# Altium PCB Yukitora_Mezanine.PcbDoc (part 2 of 2)
Units mm, origin at the board's own origin, x right, y up, seen from the top; angles counter-clockwise.
Board outline 67.05 x 88.93 mm, 2 copper layers (Top Layer, Bottom Layer); 83 components, 77 nets, 528 pads, 27 vias.
Unrouted connection lines stored in the file: 137.
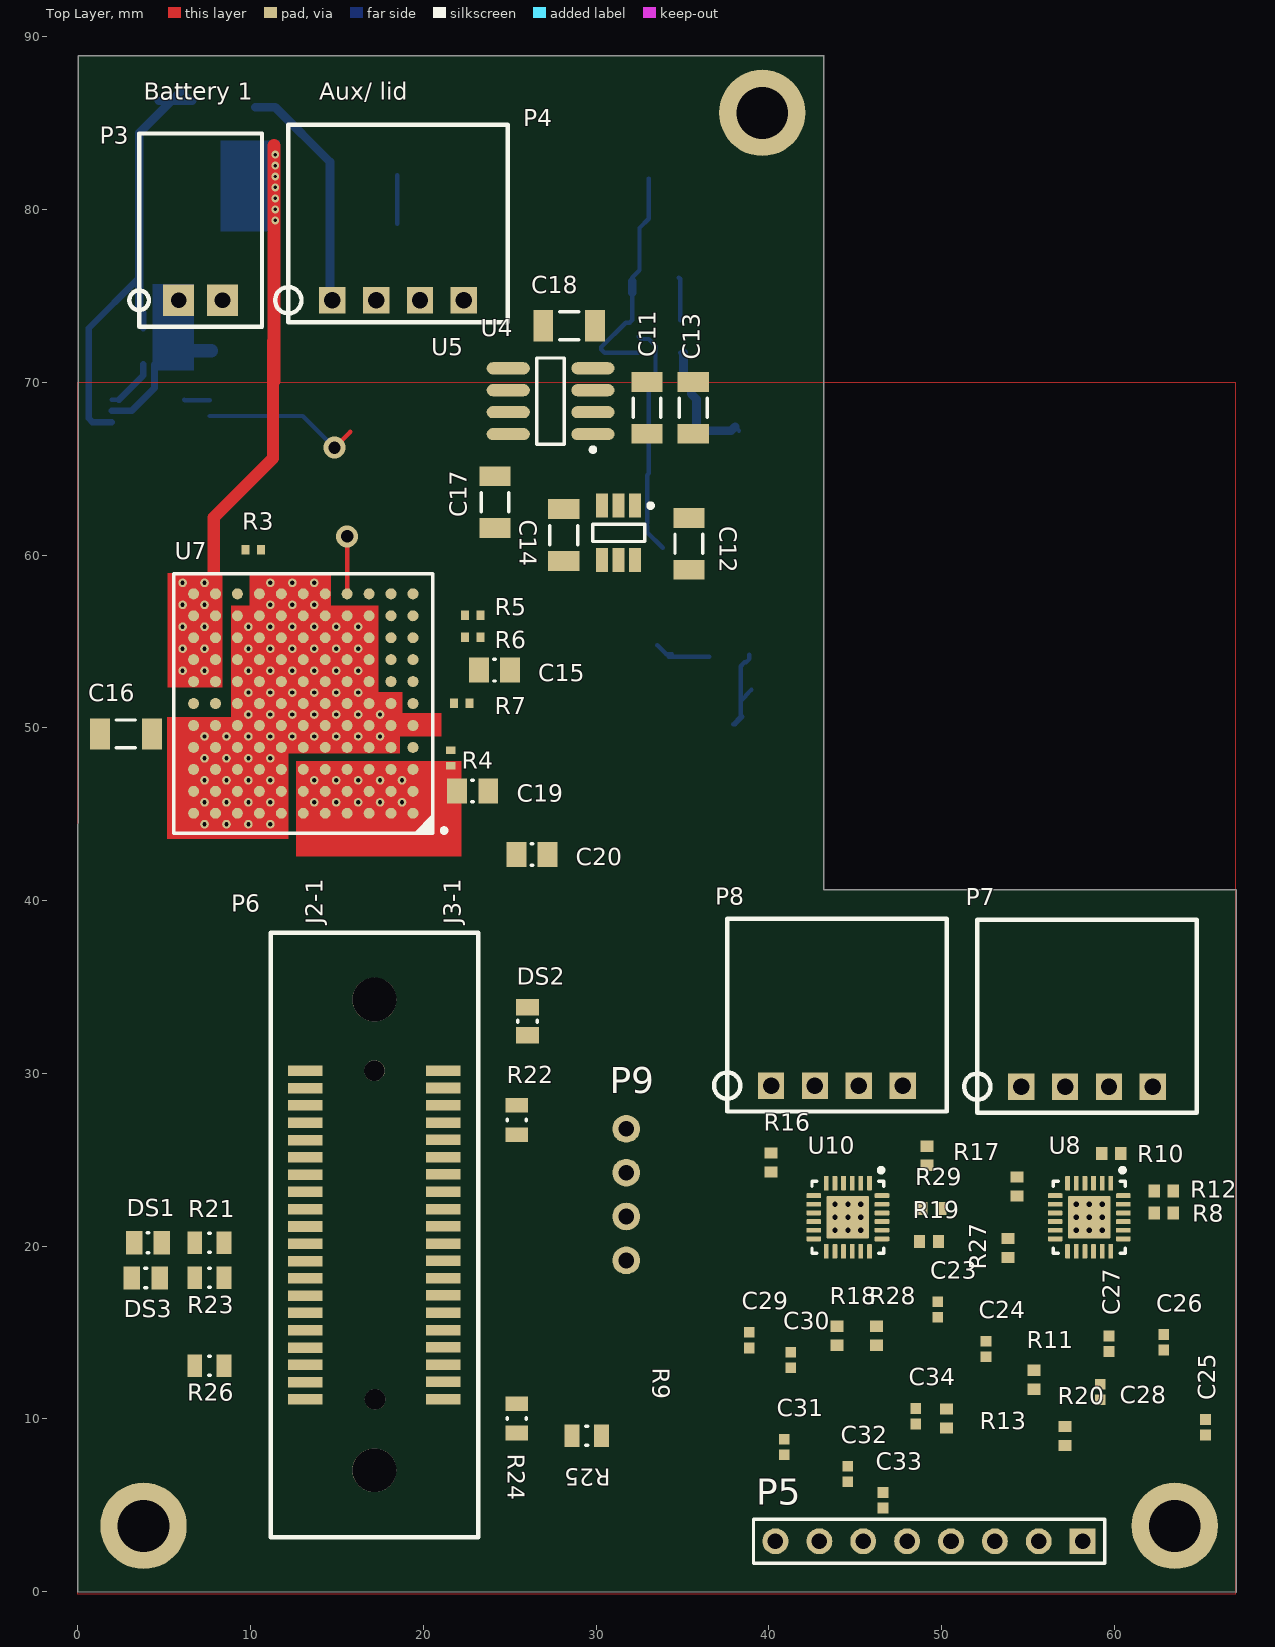
[diagram p0: Top Layer view]

## Part data (continued)
U8 U10: library part CMP-1685-00004-1, "Dual-Bridge Stepper or DC Motor Driver, 2.5 to 10.8 V, -40 to 85 degC, 24-pin QFN (RGE), Green (RoHS & no Sb/Br), Tape and Reel", Max Operating Temperature="85 degC", Min Operating Temperature="-40 degC", Min Supply Voltage="2.5 V", Nominal Supply Current="4 mA", Output Current="1.5 A", Package Quantity=3000, ComponentLink1Description="Manufacturer URL", ComponentLink1URL=http://www.ti.com/, ComponentLink2Description=Datasheet, ComponentLink2URL=http://www.ti.com/general/docs/lit/getliterature.tsp?genericPartNumber=DRV8834&fileType=pdf, DatasheetVersion="SLVSB19D, 03/2015", Mount="Surface Mount", Mounting Technology="Surface Mount", PackageDescription="24-Pin Quad Flat No-lead Package, Body 4 x 4 mm, Pitch 0.5 mm", PackageReference=RGE0024B, Packaging="Tape and Reel", Pins=24, Radiation Hardening=No, RoHSCompliant=true
P6: Supplier 1=Avnet, Supplier Part Number 1=FSI-120-03-G-D-E-AB

## Free pads (board coordinates)
  round 5 hole 3: 3(129.249,-123.168) ""(3.81,3.81) ""(39.624,85.598) ""(63.5,3.81)
  round 0.5 hole 0.25: 4(6.071,53.315) 4(6.071,54.585) 4(6.071,55.855) 4(6.071,57.125) 4(6.071,58.395) 4(7.341,44.425) 4(7.341,45.695) 4(7.341,46.965) 4(7.341,48.235) 4(7.341,49.505) 4(7.341,53.315) 4(7.341,54.585) 4(7.341,55.855) 4(7.341,57.125) 4(7.341,58.395) 4(8.611,44.425) 4(8.611,45.695) 4(8.611,46.965) 4(8.611,48.235) 4(8.611,49.505) 4(9.881,44.425) 4(9.881,45.695) 4(9.881,46.965) 4(9.881,48.235) 4(9.881,49.505) 4(9.881,50.775) 4(9.881,52.045) 4(9.881,53.315) 4(9.881,54.585) 4(9.881,55.855) 4(11.151,44.425) 4(11.151,45.695) 4(11.151,46.965) 4(11.151,48.235) 4(11.151,49.505) 4(11.151,50.775) 4(11.151,52.045) 4(11.151,53.315) 4(11.151,54.585) 4(11.151,55.855) 4(11.151,57.125) 4(11.151,58.395) 4(12.421,49.505) 4(12.421,50.775) 4(12.421,52.045) 4(12.421,53.315) 4(12.421,54.585) 4(12.421,55.855) 4(12.421,57.125) 4(12.421,58.395) 4(13.691,45.695) 4(13.691,46.965) 4(13.691,49.505) 4(13.691,50.775) 4(13.691,52.045) 4(13.691,53.315) 4(13.691,54.585) 4(13.691,55.855) 4(13.691,57.125) 4(13.691,58.395) 4(14.961,45.695) 4(14.961,46.965) 4(14.961,49.505) 4(14.961,50.775) 4(14.961,52.045) 4(14.961,53.315) 4(14.961,54.585) 4(14.961,55.855) 4(16.231,45.695) 4(16.231,46.965) 4(16.231,49.505) 4(16.231,50.775) 4(16.231,52.045) 4(16.231,53.315) 4(16.231,54.585) 4(16.231,55.855) 4(17.501,45.695) 4(17.501,46.965) 4(17.501,49.505) 4(17.501,50.775) 4(18.771,45.695) 4(18.771,46.965)

## Via types
v1: diameter 0.5, hole 0.3, Top Layer to Bottom Layer, 18 vias
v2: diameter 0.45, hole 0.2, Top Layer to Bottom Layer, tented both sides, 7 vias
v3: diameter 1.27, hole 0.711, Top Layer to Bottom Layer, 2 vias

## Nets (pads, with @x,y where several pads share a name; then routed paths per layer and width w, separated by ;. In a path a pad name is that pad's centre, name@x,y a point inside that pad or via, vN(x,y) a via of type N, cw(c..) or ccw(c..) an arc to the next point about the centre after c; other vN are vias at no path point)
5V-RC: U4.5
+3.3: C3.2 DS1.1 DS2.1 DS3.1 P2.6 P6.J2-3 P6.J2-4 R14.2 U2.5 | length 12.7
  Top Layer w0.254: v3(14.859,66.218) 15.773,67.132
  Bottom Layer w0.254: R14.2 13.023,68.054 v3(14.859,66.218) ; C3.2@33.543,54.792 34.073,54.262 C3.2 ; C3.2@34.218,54.117 U2.5@36.552,54.117
+5: C4.2 C8.2 C9.2 C10.2 C11.2 C13.2 C18.1 C23.1 C25.2 C26.2 C27.2 C29.1 C31.2 C32.2 C33.2 L1.1 P2.14 R13.1 R20.1 U2.1 U2.3 U3.4 U3.6 U4.1 U4.2 U5.1 U5.6 U8.15 U8.16 U10.15 U10.16 | length 19.1
  Bottom Layer w0.254: L1.1@32.097,75.201 32.097,73.612 31.942,73.457 31.715,73.457 30.307,72.049 C10.2 30.501,71.705 U3.4 ; L1.1@32.097,76.065 32.52,76.488 32.52,78.932 33.055,79.467 C8.2@33.055,81.803 ; C4.2@38.481,50.643 38.06,50.222 C4.2 38.375,50.643 38.375,51.645 38.375,53.573 38.597,53.794 38.679,53.794 38.88,53.995 U2.1@38.88,54.239 ; 38.481,51.645 38.653,51.817 38.653,51.868 U2.3@39.002,52.217
  Bottom Layer w0.5: L1.1@32.097,75.201 L1.1@32.097,75.836
"+5 BBB": P1.1
+9: P1.9
+12: C19.2 P1.15 P1.16 pad.4@13.691,45.695 pad.4@13.691,46.965 pad.4@14.961,45.695 pad.4@14.961,46.965 pad.4@16.231,45.695 pad.4@16.231,46.965 pad.4@17.501,45.695 pad.4@17.501,46.965 pad.4@18.771,45.695 pad.4@18.771,46.965 R4.1 R5.2 U7.A1 U7.A2 U7.A3 U7.A4 U7.A5 U7.A6 U7.B1 U7.B2 U7.B3 U7.B4 U7.B5 U7.B6 U7.C1 U7.C2 U7.C3 U7.C4 U7.C5 U7.C6 | length 0.3
  Top Layer w0.5: 20.091,43.104 20.32,42.875
-5: C12.2 P2.16 U5.2
ARRESTMENT_A1: P8.1 U10.1
ARRESTMENT_A2: P8.2 U10.3
ARRESTMENT_B1: P8.3 U10.6
ARRESTMENT_B2: P8.4 U10.4
Aux+: D1.1 P4.1 | length 13.3
  Bottom Layer w0.5: D1.1@10.287,85.928 11.43,85.928 14.605,82.753 P4.1@14.605,75.13
"Battery Thermistor": P1.2
Battery_1: C21.2 P3.1 Q1.1 Q1.2 Q1.5 Q1.6 U6.7 | length 5.7
  Bottom Layer w0.381: U6.7 3.119,68.346 4.445,69.672 Q1.2
  Bottom Layer w0.762: 6.426,71.831 C21.2
"Blue LED": P6.J2-14 R22.1
Bluetooth_RXD: P6.J2-18 R26.2
Bluetooth_TXD: P6.J2-16 R24.2 R25.2
GND: C3.1 C4.1 C6.1 C7.1 C8.1 C9.1 C10.1 C11.1 C12.1 C13.1 C16.1 C17.1 C20.1 C21.1 C24.1 C25.1 C26.1 C27.1 C28.1 C30.1 C31.1 C32.1 C33.1 C34.1 P1.6 P1.8 P1.10 P1.12 P1.13 P1.14 P2.5 P2.7 P2.9 P2.11 P2.13 P2.15 P3.2 P4.3 P4.4 P6.J2-1 P6.J2-2 pad.4@7.341,44.425 pad.4@7.341,45.695 pad.4@7.341,46.965 pad.4@7.341,48.235 pad.4@7.341,49.505 pad.4@8.611,44.425 pad.4@8.611,45.695 pad.4@8.611,46.965 pad.4@8.611,48.235 pad.4@8.611,49.505 pad.4@9.881,44.425 pad.4@9.881,45.695 pad.4@9.881,46.965 pad.4@9.881,48.235 pad.4@9.881,49.505 pad.4@9.881,50.775 pad.4@9.881,52.045 pad.4@9.881,53.315 pad.4@9.881,54.585 pad.4@9.881,55.855 pad.4@11.151,44.425 pad.4@11.151,45.695 pad.4@11.151,46.965 pad.4@11.151,48.235 pad.4@11.151,49.505 pad.4@11.151,50.775 pad.4@11.151,52.045 pad.4@11.151,53.315 pad.4@11.151,54.585 pad.4@11.151,55.855 pad.4@11.151,57.125 pad.4@11.151,58.395 pad.4@12.421,49.505 pad.4@12.421,50.775 pad.4@12.421,52.045 pad.4@12.421,53.315 pad.4@12.421,54.585 pad.4@12.421,55.855 pad.4@12.421,57.125 pad.4@12.421,58.395 pad.4@13.691,49.505 pad.4@13.691,50.775 pad.4@13.691,52.045 pad.4@13.691,53.315 pad.4@13.691,54.585 pad.4@13.691,55.855 pad.4@13.691,57.125 pad.4@13.691,58.395 pad.4@14.961,49.505 pad.4@14.961,50.775 pad.4@14.961,52.045 pad.4@14.961,53.315 pad.4@14.961,54.585 pad.4@14.961,55.855 pad.4@16.231,49.505 pad.4@16.231,50.775 pad.4@16.231,52.045 pad.4@16.231,53.315 pad.4@16.231,54.585 pad.4@16.231,55.855 pad.4@17.501,49.505 pad.4@17.501,50.775 R2.2 R6.1 R9.2 R10.2 R11.2 R12.2 R16.2 R17.2 R18.2 R19.2 U2.2 U3.2 U4.3 U4.6 U4.7 U5.5 U6.2 U6.3 U7.A7 U7.A8 U7.A9 U7.A10 U7.A11 U7.B7 U7.B8 U7.B9 U7.B10 U7.B11 U7.C7 U7.C8 U7.C9 U7.C10 U7.C11 U7.D2 U7.D3 U7.D4 U7.D5 U7.D6 U7.D7 U7.D8 U7.D9 U7.D10 U7.D11 U7.E1 U7.E2 U7.E3 U7.E4 U7.E5 U7.E6 U7.E7 U7.E8 U7.E9 U7.E10 U7.E11 U7.F2 U7.F3 U7.F4 U7.F5 U7.F6 U7.F7 U7.F8 U7.F9 U7.G3 U7.G4 U7.G5 U7.G6 U7.G7 U7.G8 U7.G9 U7.H3 U7.H4 U7.H5 U7.H6 U7.H7 U7.H8 U7.H9 U7.J3 U7.J4 U7.J5 U7.J6 U7.J7 U7.J8 U7.J9 U7.K3 U7.K4 U7.K5 U7.K6 U7.K7 U7.K8 U7.K9 U7.L1 U7.L5 U7.L6 U7.L7 U7.L8 U8.18 U8.25 U10.10 U10.11 U10.18 U10.25
  other v1: 43.827,20.925 44.577,20.925 45.327,20.925 43.827,21.675 44.577,21.675 45.327,21.675 43.827,22.425 44.577,22.425 45.327,22.425
"Green LED": P6.J2-13 R23.1
NetC5_1: C5.1 R1.2 R2.1 U3.3 | length 7.5
  Bottom Layer w0.254: U3.3 U3.3@35.087,71.705 ; R1.2 R1.2@35.503,69.471 ; R2.1@38.053,67.429 R2.1
  Bottom Layer w0.5: U3.3@35.087,71.705 35.062,71.68 35.062,69.912 R1.2 ; R1.2@35.503,69.471 35.503,69.346 35.82,69.029 35.82,67.472 36.083,67.209 37.833,67.209 R2.1@38.053,67.429
NetC14_1: C14.1 U5.4
NetC14_2: C14.2 U5.3
NetC15_1: C15.1 U7.J2
NetC18_2: C18.2 U4.4
NetC19_1: C19.1 C20.2 R5.1 R6.2 U7.J1
NetC23_2: C23.2 U8.14
NetC28_2: C28.2 R13.2
NetC29_2: C29.2 U10.14
NetC34_2: C34.2 R20.2
NetDS1_2: DS1.2 R21.2
NetDS2_2: DS2.2 R22.2
NetDS3_2: DS3.2 R23.2
NetL1_2: L1.2 U3.1 | length 2.5
  Bottom Layer w0.254: L1.2@34.797,76.065 34.865,75.997 U3.1
NetP1_3: P1.3 P4.2 | length 0.4
  Bottom Layer w0.254: P4.2 P4.2@17.272,75.13
NetP5_1: P5.1 U8.7
NetP5_2: P5.2 U8.8
NetP5_3: P5.3 U8.9
NetP5_4: P5.4 U8.10
NetP5_5: P5.5 U8.11
NetP5_6: P5.6 U10.7
NetP5_7: P5.7 U10.8
NetP5_8: P5.8 U10.9
NetQ1_3: Q1.3 U6.8 | length 3
  Bottom Layer w0.254: U6.8 U6.8@2.389,68.996
  Bottom Layer w0.381: U6.8@2.389,68.996 3.795,70.402 Q1.3
NetR3_1: R3.1 U7.L9
NetR4_2: R4.2 U7.D1
NetR7_2: R7.2 U7.H1
NetR8_1: R8.1 U8.22
NetR8_2: R8.2 U8.13
NetR9_1: R9.1 U8.5
NetR10_1: R10.1 U8.2
NetR11_1: R11.1 U8.24
NetR12_1: R12.1 U8.23
NetR16_1: R16.1 U10.5
NetR17_1: R17.1 U10.2
NetR18_1: R18.1 U10.24
NetR19_1: R19.1 U10.23
NetR27_2: R27.2 U8.12
NetR28_2: R28.2 U10.12
NetR29_1: R29.1 U10.22
NetR29_2: R29.2 U10.13
NetU8_19: U8.19 U8.20 U8.21
NetU10_19: U10.19 U10.20 U10.21
Power_IN: C17.2 F1.2 pad.4@6.071,53.315 pad.4@6.071,54.585 pad.4@6.071,55.855 pad.4@6.071,57.125 pad.4@6.071,58.395 pad.4@7.341,53.315 pad.4@7.341,54.585 pad.4@7.341,55.855 pad.4@7.341,57.125 pad.4@7.341,58.395 U4.8 U7.G10 U7.G11 U7.H10 U7.H11 U7.J10 U7.J11 U7.K10 U7.K11 U7.L4 U7.L10 U7.L11 | length 32
  Top Layer w0.254: U7.L4 v3(15.596,61.087)
  Top Layer w0.7: 7.874,58.776 7.874,62.179 11.303,65.608 11.303,72.39
  Top Layer w0.762: 11.354,70.079 11.354,83.693
  other v2: 11.43,79.375 11.43,80.01 11.43,80.645 11.43,81.28 11.43,81.915 11.43,82.55 11.43,83.185
Prefuse: C16.2 D1.2 F1.1 Q1.4 U6.6 | length 28.5
  Bottom Layer w0.254: 3.556,76.048 3.556,76.175 ; 4.648,86.258 4.699,86.309 ; D1.2@6.033,86.906 D1.2@6.63,86.309
  Bottom Layer w0.381: U6.6 0.858,67.696 0.635,67.92 0.635,73.127 3.556,76.048
  Bottom Layer w0.4: 3.556,74.244 3.795,74.005 Q1.4
  Bottom Layer w0.5: 3.556,74.244 3.556,76.048 ; 3.556,76.175 3.556,84.43 D1.2@6.033,86.906 ; 4.699,86.309 D1.2@6.63,86.309
"Red LED": P6.J2-11 R21.1
RS232_RX: P9.1 R25.1
RS232_TX: P9.3 R26.1
SHAFT_A1: P7.1 U8.1
SHAFT_A2: P7.2 U8.3
SHAFT_B1: P7.3 U8.6
SHAFT_B2: P7.4 U8.4
Stat1: R14.1 U6.1 | length 1.5
  Bottom Layer w0.254: U6.1 6.185,68.975 7.624,68.975 R14.1
Sys_Pwr_Enable: P1.7
VCC_2V85: P6.J3-20 R24.1
VINTA: C30.2 R28.1 U10.17
VINTS: C24.2 R27.1 U8.17
ZH: C5.2 C6.2 C7.2 P2.12 R1.1 U3.5 | length 16.1
  Bottom Layer w0.254: 18.5,79.177 18.5,81.985 ; U3.5 32.613,72.507 33.05,72.507 33.442,72.115 33.442,69.998 33.063,69.619 33.063,64.735 C6.2 C7.2@32.963,61.841 ; C7.2 32.956,61.329 33.858,60.427
pads on no net: C15.2 P1.4 P1.5 P1.11 P2.1 P2.2 P2.3 P2.4 P2.8 P2.10 P6.hole P6.J2-5 P6.J2-6 P6.J2-7 P6.J2-8 P6.J2-9 P6.J2-10 P6.J2-12 P6.J2-15 P6.J2-17 P6.J2-19 P6.J2-20 P6.J3-1 P6.J3-2 P6.J3-3 P6.J3-4 P6.J3-5 P6.J3-6 P6.J3-7 P6.J3-8 P6.J3-9 P6.J3-10 P6.J3-11 P6.J3-12 P6.J3-13 P6.J3-14 P6.J3-15 P6.J3-16 P6.J3-17 P6.J3-18 P6.J3-19 P9.2 P9.4 R3.2 R7.1 U2.4 U6.4 U6.5 U7.F1 U7.F10 U7.F11 U7.G1 U7.G2 U7.H2 U7.K1 U7.K2 U7.L2 U7.L3
copper on no net:
  other v1: 57.797,20.925 58.547,20.925 59.297,20.925 57.797,21.675 58.547,21.675 59.297,21.675 57.797,22.425 58.547,22.425 59.297,22.425

## Polygon pours and split planes (outlines as drawn)
+5 on Bottom Layer "5V" (solid, shelved, pour order 0): 31.061,66.357 20.647,66.357 20.647,70.167 31.061,70.167
ZH on Bottom Layer "ZH" (solid, shelved, pour order 6): 50.013,62.762 37.313,62.762 37.313,60.222 37.567,60.476 50.013,60.476
no net on Bottom Layer "C21_1" (solid, shelved, pour order 8): 48.997,59.968 43.409,59.968 43.409,55.142 45.695,55.142 45.695,57.936 48.997,57.936
GND on Bottom Layer "GND" (solid, shelved, pour order 10): 59.411,69.366 59.411,53.618 36.297,53.618 36.297,69.366
GND on Bottom Layer "NONET_L02_P014" (solid, shelved, pour order 14): 38.735,48.006 38.735,44.069 44.45,44.069 44.45,45.085 46.177,45.085 46.177,40.767 49.301,40.767 49.327,40.792 49.327,35.128 48.565,35.128 48.514,35.179 48.514,33.274 44.45,33.274 44.45,34.925 38.735,34.925 38.735,31.318 44.45,31.318 44.45,32.258 46.177,32.258 46.177,27.686 48.895,27.686 48.895,25.171 50.8,25.171 50.8,31.242 52.07,31.242 52.07,32.512 57.15,32.512 57.15,43.561 52.197,43.561 52.197,45.085 50.673,45.085 50.673,50.419 48.641,50.419 48.641,46.355 44.45,46.355 44.45,48.006
GND on Bottom Layer "GND_L02_P004" (solid, shelved, pour order 4): 67.007,69.988 67.007,-0.012 0.007,-0.012 0.007,69.988
GND on Top Layer "NONET_L01_P002" (solid, shelved, pour order 2): -0.019,69.99 -0.019,-0.114 67.037,-0.114 67.037,69.99

## Other copper
Top Layer:
  rectangle net Power_IN: 5.207,52.349 8.382,58.979
  rectangle net +12: 12.624,42.545 22.225,48.082
  rectangle net GND: 5.182,43.561 12.192,50.622
  rectangle net GND: 8.865,48.514 14.707,57.074
  rectangle net GND: 9.931,56.947 14.656,58.979
  rectangle net GND: 14.681,49.505 21.057,50.851
  rectangle net GND: 14.681,48.514 18.669,49.606
  rectangle net GND: 12.116,50.698 18.796,52.07
  rectangle net GND: 14.656,52.045 17.424,57.074
Bottom Layer:
  rectangle net Power_IN: 8.255,78.74 11.709,83.998
  rectangle net Battery_1: 4.318,70.688 6.731,75.692

## Silkscreen, mask and mechanical layers (free items; w line width, h text height)
Top Overlay:
  circle w0.254: c79.455,68.378 r5
  circle w0.1: c79.455,68.378 r4.663
  lines w0.127: 77.931,70.741 78.693,69.979 79.455,70.487 78.439,69.217 79.963,69.979 78.947,68.709 80.471,69.471 79.455,68.201 80.979,68.963 79.963,67.693 81.487,68.455 80.979,67.693 81.741,66.931
  lines w0.254: 77.423,70.868 78.439,70.868 ; 77.931,70.741 77.931,66.931 81.741,66.931 ; 81.868,66.423 81.868,67.439
  text "Battery 1" at 3.81,86.36 h1
  text "Aux/ lid" at 13.97,86.36 h1
  text "Power Input Module" at 18.466,-3.023 h1
  text "LM-008" at 26.34,-4.343 h1
  text "ZLS Corp" at 15.443,-7.087 h1
  text "REV A1" at 25.629,-7.315 h1
  text "ZLS" at 37.973,-8.255 h1.2

## Dimensions
68.148,40.742 to 43.18,88.9 on Mechanical 2
43.256,91.237 to 43.18,88.9 on Mechanical 2
0,0 to 67.007,-1.012 on Mechanical 1
0,0 to 1.372,89.002 on Mechanical 1
3.81,3.81 to 0,0 on Mechanical 1
3.81,3.81 to 63.5,3.81 on Mechanical 1
63.5,3.81 to 117.297,4.242 on Mechanical 1

## Text inside footprints (layer, text, board x,y; h text height)
P6: Top Overlay "J2-1" at 14.173,38.643 h1 r90; Top Overlay "J3-1" at 22.173,38.643 h1 r90